# EAGLE board ULN2803-WS2803 (EAGLE 5.10)

Size 37.72 x 23.24 mm. Coordinates in mm from the lower left corner, seen from the top.
Outline: 29.08,5.08 29.08,3.81
Outline: 29.08,5.08 29.08,6.35
Outline: 29.08,6.35 29.08,7.62
Outline: 29.08,7.62 29.08,8.89
Outline: 29.08,8.89 29.08,10.16
Outline: 29.08,10.16 29.08,11.43
Outline: 29.08,11.43 29.08,12.7
Outline: 29.08,12.7 29.08,13.97
Outline: 29.08,13.97 29.08,15.24
Outline: 37.72,13.97 29.08,13.97
Outline: 37.72,12.7 29.08,12.7
Outline: 37.72,11.43 29.08,11.43
Outline: 37.72,10.16 29.08,10.16
Outline: 37.72,8.89 29.08,8.89
Outline: 37.72,7.62 29.08,7.62
Outline: 37.72,6.35 29.08,6.35
Outline: 29.08,11.43 15.49,11.43 14.22,12.7 7.87,12.7
Outline: 29.08,13.97 16.51,13.97 12.7,17.78 7.87,17.78
Outline: 29.08,15.24 29.08,16.51
Outline: 29.08,16.51 29.08,17.78
Outline: 29.08,17.78 29.08,19.05
Outline: 29.08,19.05 21.08,19.05 21.08,20.32
Outline: 29.08,19.05 29.08,20.32
Outline: 29.08,17.78 37.72,17.78
Outline: 37.72,20.32 29.08,20.32
Outline: 37.72,19.18 29.08,19.05
Outline: 29.08,8.89 15.37,8.89 14.1,7.62 7.87,7.62
Outline: 29.08,12.7 16,12.7 13.46,15.24 7.87,15.24
Outline: 37.72,5.08 29.08,5.08
Outline: 29.08,16.51 37.72,16.51
Outline: 29.08,15.24 37.72,15.24
Outline: 7.87,17.78 7.87,20.32
Outline: 7.87,15.24 7.87,12.7
Outline: 7.87,10.16 7.87,7.62
Outline: 7.87,5.08 7.87,2.54
Outline: 7.87,20.32 0,20.32
Outline: 0,20.32 0,17.78
Outline: 0,17.78 7.87,17.78
Outline: 7.87,17.78 7.87,15.24
Outline: 7.87,15.24 0,15.24
Outline: 0,15.24 0,17.78
Outline: 0,15.24 0,12.7
Outline: 0,12.7 7.87,12.7
Outline: 7.87,12.7 7.87,10.16
Outline: 7.87,10.16 0,10.16
Outline: 0,10.16 0,12.7
Outline: 0,10.16 0,7.62
Outline: 0,7.62 7.87,7.62
Outline: 7.87,7.62 7.87,5.08
Outline: 7.87,5.08 0,5.08
Outline: 0,5.08 0,7.62
Outline: 0,5.08 0,2.54
Outline: 0,2.54 7.87,2.54
Outline: 7.87,2.54 7.87,0
Outline: 7.87,0 0,0 0,2.54
Outline: 37.72,3.81 29.08,3.81
Outline: 29.08,20.32 21.08,20.32
Outline: 21.08,20.32 19.18,20.32
Outline: 16.51,20.32 14.1,20.32
Outline: 14.1,20.32 7.87,20.32
Outline: 7.87,10.16 29.08,10.16
Outline: 29.08,7.62 16.13,7.62 13.59,5.08 7.87,5.08
Outline: 29.08,6.35 16.64,6.35 12.83,2.54 7.87,2.54
Outline: 22.35,5.08 17.14,5.08 14.86,2.79 14.86,0
Outline: 22.35,5.08 29.08,5.08
Outline: 29.08,15.24 17.02,15.24 14.1,18.16 14.1,20.32
Outline: 29.08,3.81 22.35,3.81 22.35,5.08
Outline: 29.08,20.32 29.08,23.24
Outline: 29.08,23.24 7.87,23.24
Outline: 7.87,23.24 7.87,20.32
Outline: 0,20.32 0,23.24 7.87,23.24
Outline: 19.18,20.32 19.18,17.78 29.08,17.78
Outline: 19.18,20.32 16.51,20.32
Outline: 16.51,20.32 16.51,18.16 18.16,16.51 29.08,16.51
Outline: 7.87,0 14.86,0
Outline: 14.86,0 37.72,0 37.72,3.81
Outline: 37.72,3.81 37.72,5.08
Outline: 37.72,5.08 37.72,6.35
Outline: 37.72,6.35 37.72,7.62
Outline: 37.72,7.62 37.72,8.89
Outline: 37.72,8.89 37.72,10.16
Outline: 37.72,10.16 37.72,11.43
Outline: 37.72,11.43 37.72,12.7
Outline: 37.72,12.7 37.72,13.97
Outline: 37.72,13.97 37.72,15.24
Outline: 37.72,15.24 37.72,16.51
Outline: 37.72,16.51 37.72,17.78
Outline: 37.72,17.78 37.72,19.18
Outline: 37.72,19.18 37.72,20.32
Outline: 37.72,20.32 37.72,23.24 29.08,23.24
Copper layers (1*16): Top 0.035mm / dielectric 1.5mm / Bottom 0.035mm
Design rules "default": minimum track width 10mil, minimum drill 24mil, track to track 8mil, track to pad 8mil, pad to pad 8mil, via to via 8mil, smd to smd 8mil, copper to edge 40mil, drill to drill 8mil, minimum pad ring 10mil, minimum via ring 8mil, stop-mask expansion 4mil, vias tented up to drill 0mil, thermal gap 10mil

## Footprints (pad centres in the part's own frame; a part is rotated, then mirrored left to right if it is on the bottom)
SO28W = smd 0.66 x 2.032: 1 -8.255,-5.029; 2 -6.985,-5.029; 3 -5.715,-5.029; 4 -4.445,-5.029; 5 -3.175,-5.029; 6 -1.905,-5.029; 7 -0.635,-5.029; 8 0.635,-5.029; 9 1.905,-5.029; 10 3.175,-5.029; 11 4.445,-5.029; 12 5.715,-5.029; 13 6.985,-5.029; 14 8.255,-5.029; 15 8.255,5.029; 16 6.985,5.029; 17 5.715,5.029; 18 4.445,5.029; 19 3.175,5.029; 20 1.905,5.029; 21 0.635,5.029; 22 -0.635,5.029; 23 -1.905,5.029; 24 -3.175,5.029; 25 -4.445,5.029; 26 -5.715,5.029; 27 -6.985,5.029; 28 -8.255,5.029

## Placement (x,y rotation side)
E$182  [SO28W]  28.92,12.72 270 top

## Library data of the parts
E$182 = linear

## Nets
GND1: E$182.1

## Text on the board
Unrouted: 12V | GND | +5V | OUT8 | IN8 | GND | GND | GND | VCC | VCC | VCC | NC | NC | NC | NC | NC | NC | NC | OUT7 | IN7 | CKI | CKO | OUT6 | IN6 | SDI | SDO | 0 | 17 | 1 | 16 | OUT5 | IN5 | 2 | 15 | OUT4 | IN4 | 3 | 14 | 4 | 13 | 5 | 12 | OUT3 | IN3 | 6 | 11 | OUT2 | IN2 | 7 | 10 | 8 | 9 | OUT1 | IN1